# EAGLE board RoomIndicator.Outside.Multiple (EAGLE 6.4)
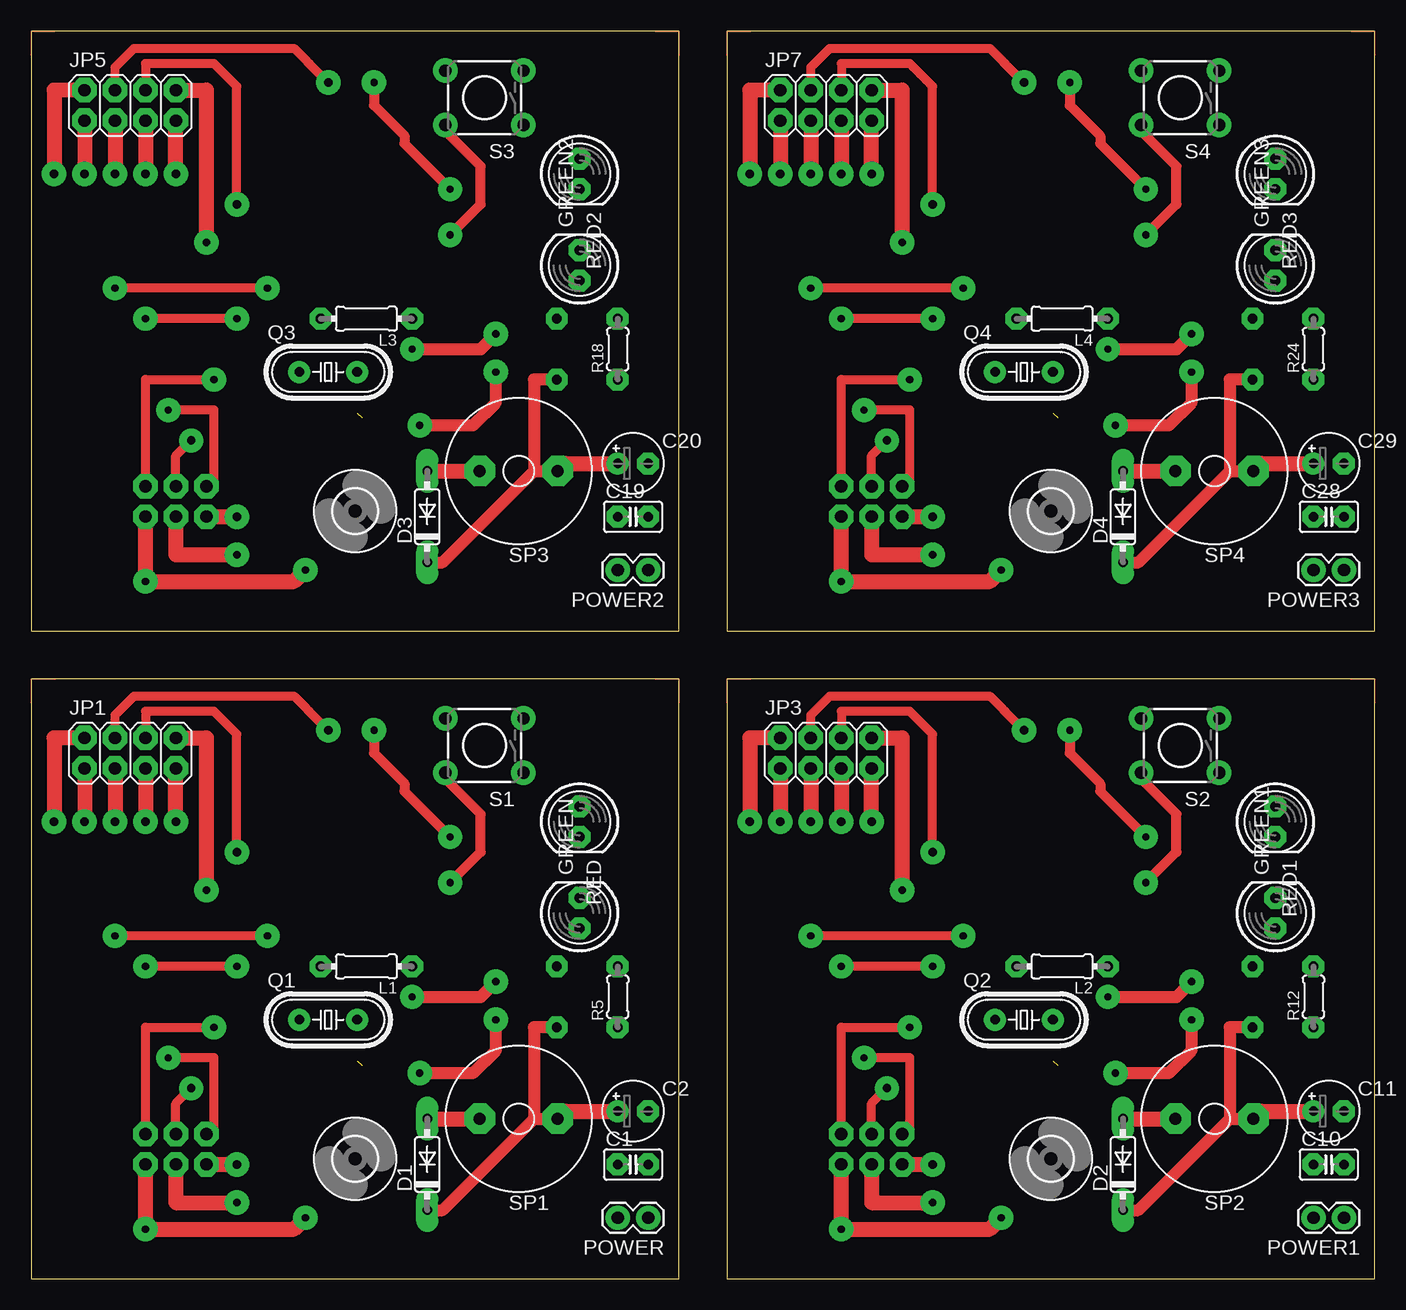
[diagram p0: board, top side]
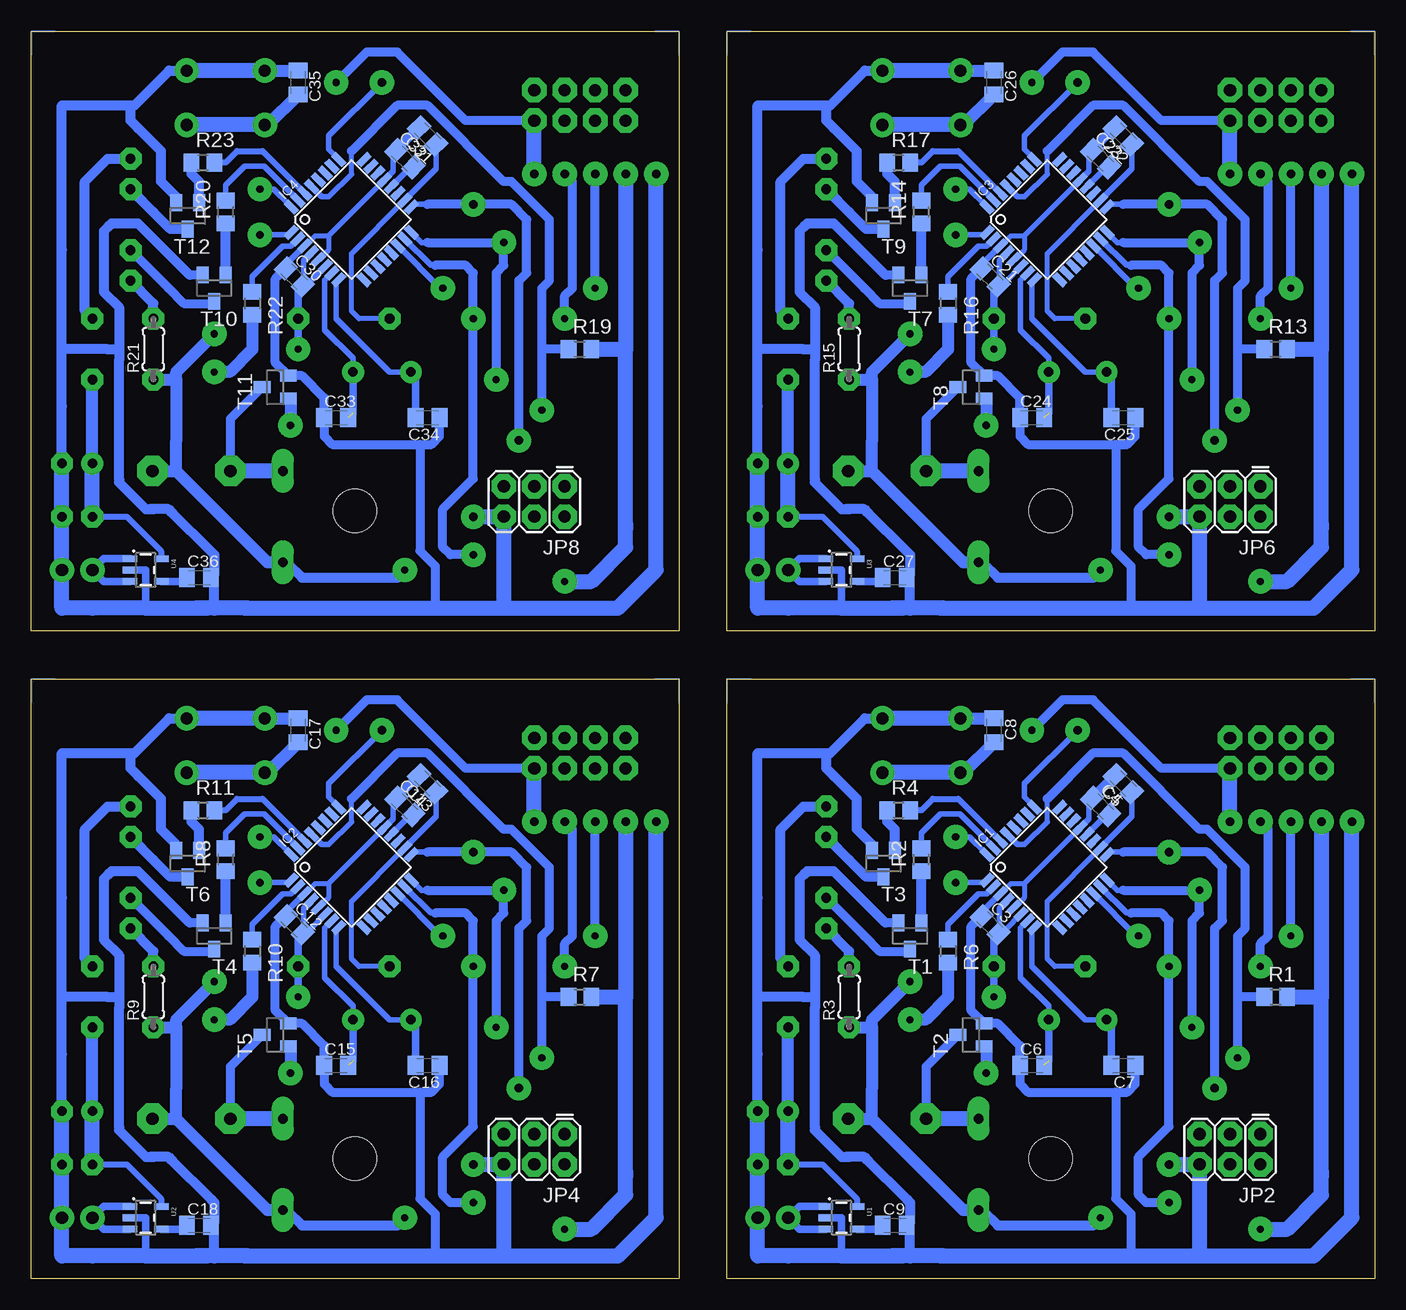
[diagram p1: board, bottom side, seen from below]

Size 112 x 104 mm. Coordinates in mm from the lower left corner, seen from the top.
Outline: 0,0 54,0 54,50 0,50 0,0
Outline: 58,0 112,0 112,50 58,50 58,0
Outline: 0,54 54,54 54,104 0,104 0,54
Outline: 58,54 112,54 112,104 58,104 58,54
Copper layers (1*16): Top 0.035mm / dielectric 1.5mm / Bottom 0.035mm
Design rules "default *": minimum track width 10mil, minimum drill 24mil, track to track 8mil, track to pad 8mil, pad to pad 8mil, via to via 8mil, smd to smd 8mil, copper to edge 40mil, drill to drill 8mil, minimum pad ring 20mil, minimum via ring 10mil, stop-mask expansion 4mil, vias tented up to drill 0mil, thermal gap 10mil

## Footprints (pad centres in the part's own frame; a part is rotated, then mirrored left to right if it is on the bottom)
C025-025X050 = drill 0.813 octagon: 1 -1.27,0; 2 1.27,0
E2,5-5 = drill 0.813 pad 1.6: + -1.27,0 | drill 0.813 pad 1.6 octagon: - 1.27,0
C0805K = smd 1.3 x 1.6: 1 -1,0; 2 1,0
DO35-7 = drill 0.813 long: A 3.81,0; C -3.81,0
LED5MM = drill 0.813 octagon: A -1.27,0; K 1.27,0
TQFP32-08 = smd 1.27 x 0.559: 1 -4.293,2.8; 2 -4.293,2; 3 -4.293,1.2; 4 -4.293,0.4; 5 -4.293,-0.4; 6 -4.293,-1.2; 7 -4.293,-2; 8 -4.293,-2.8; 17 4.293,-2.8; 18 4.293,-2; 19 4.293,-1.2; 20 4.293,-0.4; 21 4.293,0.4; 22 4.293,1.2; 23 4.293,2; 24 4.293,2.8 | smd 0.559 x 1.27: 9 -2.8,-4.293; 10 -2,-4.293; 11 -1.2,-4.293; 12 -0.4,-4.293; 13 0.4,-4.293; 14 1.2,-4.293; 15 2,-4.293; 16 2.8,-4.293; 25 2.8,4.293; 26 2,4.293; 27 1.2,4.293; 28 0.4,4.293; 29 -0.4,4.293; 30 -1.2,4.293; 31 -2,4.293; 32 -2.8,4.293
2X04 = drill 1.016 octagon: 1 -3.81,-1.27; 2 -3.81,1.27; 3 -1.27,-1.27; 4 -1.27,1.27; 5 1.27,-1.27; 6 1.27,1.27; 7 3.81,-1.27; 8 3.81,1.27
2X3 = drill 1.016 pad 1.88 octagon: 1 0,0; 2 0,2.54; 3 2.54,0; 4 2.54,2.54; 5 5.08,0; 6 5.08,2.54
0204/7 = drill 0.813 octagon: 1 -3.81,0; 2 3.81,0
1X02 = drill 1.016 pad 1.88: 1 0,0; 2 2.54,0
HC49/S = drill 0.813: 1 -2.413,0; 2 2.413,0
R0805 = smd 1.3 x 1.5: 1 -0.95,0; 2 0.95,0
0204/5 = drill 0.813 octagon: 1 -2.54,0; 2 2.54,0
TACTILE-PTH = drill 1.016 pad 1.88: 1 -3.251,2.261; 2 3.251,2.261; 3 -3.251,-2.261; 4 3.251,-2.261
AL60P = drill 1.016 pad 2.54 octagon: 1 -3.251,0; 2 3.251,0
SOT23 = smd 1 x 1.4: 1 -0.95,-1.1; 2 0.95,-1.1; 3 0,1.1
SOT23-5 = smd 0.55 x 1.2: 1 -0.95,-1.3; 2 0,-1.3; 3 0.95,-1.3; 4 0.95,1.3; 5 -0.95,1.3
3,6 = hole 3.6: 0,0

## Placement (x,y rotation side)
C1  100n  [C025-025X050]  50.16,9.53 0 top
C2  100uF  [E2,5-5]  50.16,13.97 0 top
C3  100n  [C0805K]  32.07,29.53 315 bottom
C4  100n  [C0805K]  22.86,39.37 315 bottom
C5  100n  [C0805K]  20.95,41.27 135 bottom
C6  27p  [C0805K]  28.57,17.78 0 bottom
C7  27p  [C0805K]  20.95,17.78 180 bottom
C8  100n  [C0805K]  31.75,45.72 270 bottom
C9  180p  [C0805K]  40.01,4.45 0 bottom
C10  100n  [C025-025X050]  108.17,9.53 0 top
C11  100uF  [E2,5-5]  108.17,13.97 0 top
C12  100n  [C0805K]  90.07,29.53 315 bottom
C13  100n  [C0805K]  80.86,39.37 315 bottom
C14  100n  [C0805K]  78.95,41.27 135 bottom
C15  27p  [C0805K]  86.58,17.78 0 bottom
C16  27p  [C0805K]  78.95,17.78 180 bottom
C17  100n  [C0805K]  89.75,45.72 270 bottom
C18  180p  [C0805K]  98,4.45 0 bottom
C19  100n  [C025-025X050]  50.16,63.52 0 top
C20  100uF  [E2,5-5]  50.16,67.97 0 top
C21  100n  [C0805K]  32.07,83.53 315 bottom
C22  100n  [C0805K]  22.86,93.37 315 bottom
C23  100n  [C0805K]  20.95,95.28 135 bottom
C24  27p  [C0805K]  28.57,71.78 0 bottom
C25  27p  [C0805K]  20.95,71.78 180 bottom
C26  100n  [C0805K]  31.75,99.72 270 bottom
C27  180p  [C0805K]  40.01,58.45 0 bottom
C28  100n  [C025-025X050]  108.17,63.52 0 top
C29  100uF  [E2,5-5]  108.17,67.97 0 top
C30  100n  [C0805K]  90.07,83.53 315 bottom
C31  100n  [C0805K]  80.86,93.37 315 bottom
C32  100n  [C0805K]  78.95,95.28 135 bottom
C33  27p  [C0805K]  86.58,71.78 0 bottom
C34  27p  [C0805K]  78.95,71.78 180 bottom
C35  100n  [C0805K]  89.75,99.72 270 bottom
C36  180p  [C0805K]  98,58.45 0 bottom
D1  1N4148  [DO35-7]  33.02,9.53 90 top
D2  1N4148  [DO35-7]  91.02,9.53 90 top
D3  1N4148  [DO35-7]  33.02,63.52 90 top
D4  1N4148  [DO35-7]  91.02,63.52 90 top
GREEN  GREEN  [LED5MM]  45.72,30.48 90 top
GREEN1  GREEN  [LED5MM]  103.72,30.48 90 top
GREEN2  GREEN  [LED5MM]  45.72,84.48 90 top
GREEN3  GREEN  [LED5MM]  103.72,84.48 90 top
IC1  MEGA328P  [TQFP32-08]  27.3,34.29 45 bottom
IC2  MEGA328P  [TQFP32-08]  85.31,34.29 45 bottom
IC3  MEGA328P  [TQFP32-08]  27.3,88.29 45 bottom
IC4  MEGA328P  [TQFP32-08]  85.31,88.29 45 bottom
JP1  NRF24L01  [2X04]  8.26,43.81 0 top
JP2  SPI  [2X3]  9.53,12.06 180 bottom
JP3  NRF24L01  [2X04]  66.25,43.81 0 top
JP4  SPI  [2X3]  67.53,12.06 180 bottom
JP5  NRF24L01  [2X04]  8.26,97.81 0 top
JP6  SPI  [2X3]  9.53,66.06 180 bottom
JP7  NRF24L01  [2X04]  66.25,97.81 0 top
JP8  SPI  [2X3]  67.53,66.06 180 bottom
L1  10uH  [0204/7]  27.94,26.04 180 top
L2  10uH  [0204/7]  85.94,26.04 180 top
L3  10uH  [0204/7]  27.94,80.03 180 top
L4  10uH  [0204/7]  85.94,80.03 180 top
POWER  [1X02]  51.44,5.08 180 top
POWER1  [1X02]  109.44,5.08 180 top
POWER2  [1X02]  51.44,59.08 180 top
POWER3  [1X02]  109.44,59.08 180 top
Q1  8MHz  [HC49/S]  24.77,21.59 0 top
Q2  8MHz  [HC49/S]  82.77,21.59 0 top
Q3  8MHz  [HC49/S]  24.77,75.59 0 top
Q4  8MHz  [HC49/S]  82.77,75.59 0 top
R1  10k  [R0805]  8.26,23.5 0 bottom
R2  10k  [R0805]  37.78,34.92 90 bottom
R3  30  [0204/5]  43.81,23.5 90 bottom
R4  10k  [R0805]  39.69,39.05 0 bottom
R5  30  [0204/5]  48.9,23.5 90 top
R6  10k  [R0805]  35.56,27.3 270 bottom
R7  10k  [R0805]  66.25,23.5 0 bottom
R8  10k  [R0805]  95.78,34.92 90 bottom
R9  30  [0204/5]  101.81,23.5 90 bottom
R10  10k  [R0805]  93.56,27.3 270 bottom
R11  10k  [R0805]  97.69,39.05 0 bottom
R12  30  [0204/5]  106.89,23.5 90 top
R13  10k  [R0805]  8.26,77.5 0 bottom
R14  10k  [R0805]  37.78,88.92 90 bottom
R15  30  [0204/5]  43.81,77.5 90 bottom
R16  10k  [R0805]  35.56,81.31 270 bottom
R17  10k  [R0805]  39.69,93.05 0 bottom
R18  30  [0204/5]  48.9,77.5 90 top
R19  10k  [R0805]  66.25,77.5 0 bottom
R20  10k  [R0805]  95.78,88.92 90 bottom
R21  30  [0204/5]  101.81,77.5 90 bottom
R22  10k  [R0805]  93.56,81.31 270 bottom
R23  10k  [R0805]  97.69,93.05 0 bottom
R24  30  [0204/5]  106.89,77.5 90 top
RED  GREEN  [LED5MM]  45.72,38.1 270 top
RED1  GREEN  [LED5MM]  103.72,38.1 270 top
RED2  GREEN  [LED5MM]  45.72,92.1 270 top
RED3  GREEN  [LED5MM]  103.72,92.1 270 top
S1  [TACTILE-PTH]  37.78,44.45 180 top
S2  [TACTILE-PTH]  95.78,44.45 180 top
S3  [TACTILE-PTH]  37.78,98.45 180 top
S4  [TACTILE-PTH]  95.78,98.45 180 top
SP1  AL60P  [AL60P]  40.64,13.34 180 top
SP2  AL60P  [AL60P]  98.64,13.34 180 top
SP3  AL60P  [AL60P]  40.64,67.33 180 top
SP4  AL60P  [AL60P]  98.64,67.33 180 top
T1  BC847  [SOT23]  38.73,28.57 180 bottom
T2  BC847  [SOT23]  33.66,20.32 90 bottom
T3  BC847  [SOT23]  40.96,34.61 180 bottom
T4  BC847  [SOT23]  96.73,28.57 180 bottom
T5  BC847  [SOT23]  91.66,20.32 90 bottom
T6  BC847  [SOT23]  98.96,34.61 180 bottom
T7  BC847  [SOT23]  38.73,82.58 180 bottom
T8  BC847  [SOT23]  33.66,74.32 90 bottom
T9  BC847  [SOT23]  40.96,88.61 180 bottom
T10  BC847  [SOT23]  96.73,82.58 180 bottom
T11  BC847  [SOT23]  91.66,74.32 90 bottom
T12  BC847  [SOT23]  98.96,88.61 180 bottom
U1  3.3V/150mA  [SOT23-5]  44.45,5.08 270 bottom
U2  3.3V/150mA  [SOT23-5]  102.45,5.08 270 bottom
U3  3.3V/150mA  [SOT23-5]  44.45,59.08 270 bottom
U4  3.3V/150mA  [SOT23-5]  102.45,59.08 270 bottom
U$1  [3,6]  27,10 0 top
U$2  [3,6]  85,10 0 top
U$3  [3,6]  27,64 0 top
U$4  [3,6]  85,64 0 top

## Library data of the parts
C1-C36 L1-L4 R1-R24 = rcl
D1-D4 = diode
GREEN GREEN1-GREEN3 RED RED1-RED3 = led
IC1-IC4 = atmel; MPN: ATMEGA8-16AU; OC_FARNELL: 9171371; OC_NEWARK: 73M8863
JP1 JP3 JP5 JP7 = pinhead
JP2 JP4 JP6 JP8 POWER POWER1-POWER3 = SparkFun-Connectors
Q1-Q4 = crystal; OC_FARNELL: 1667008; OC_NEWARK: unknown
S1-S4 = SparkFun-Retired
SP1-SP4 = buzzer; OC_FARNELL: unknown; OC_NEWARK: unknown
T1-T12 = transistor
U1-U4 = SparkFun-PowerIC; PROD_ID: VREG-00822
U$1-U$4 = holes

## Nets
+3V1: C10.1 C11.+ C12.2 D2.C IC2.4 IC2.6 JP3.1 JP4.2 L2.1 R7.2 R9.1 R12.1 SP2.1 U2.5
+3V2: C19.1 C20.+ C21.2 D3.C IC3.4 IC3.6 JP5.1 JP6.2 L3.1 R13.2 R15.1 R18.1 SP3.1 U3.5
+3V3: C1.1 C2.+ C3.2 D1.C IC1.4 IC1.6 JP1.1 JP2.2 L1.1 R1.2 R3.1 R5.1 SP1.1 U1.5
+3V4: C28.1 C29.+ C30.2 D4.C IC4.4 IC4.6 JP7.1 JP8.2 L4.1 R19.2 R21.1 R24.1 SP4.1 U4.5
AVCC: C5.1 IC1.18 L1.2
AVCC1: C14.1 IC2.18 L2.2
AVCC2: C23.1 IC3.18 L3.2
AVCC3: C32.1 IC4.18 L4.2
BLUE: IC1.31 R2.2
BLUE1: IC2.31 R8.2
BLUE2: IC3.31 R14.2
BLUE3: IC4.31 R20.2
BUZZ: IC1.2 R6.1
BUZZ1: IC2.2 R10.1
BUZZ2: IC3.2 R16.1
BUZZ3: IC4.2 R22.1
CE: IC1.25 JP1.4
CE1: IC2.25 JP3.4
CE2: IC3.25 JP5.4
CE3: IC4.25 JP7.4
CSN: IC1.14 JP1.3
CSN1: IC2.14 JP3.3
CSN2: IC3.14 JP5.3
CSN3: IC4.14 JP7.3
GND: C1.2 C2.- C3.1 C4.1 C5.2 C6.1 C7.1 C8.1 C9.2 IC1.3 IC1.5 IC1.21 JP1.2 JP2.6 POWER.1 S1.3 S1.4 T1.2 T2.2 T3.2 U1.2
GND1: C10.2 C11.- C12.1 C13.1 C14.2 C15.1 C16.1 C17.1 C18.2 IC2.3 IC2.5 IC2.21 JP3.2 JP4.6 POWER1.1 S2.3 S2.4 T4.2 T5.2 T6.2 U2.2
GND2: C19.2 C20.- C21.1 C22.1 C23.2 C24.1 C25.1 C26.1 C27.2 IC3.3 IC3.5 IC3.21 JP5.2 JP6.6 POWER2.1 S3.3 S3.4 T7.2 T8.2 T9.2 U3.2
GND3: C28.2 C29.- C30.1 C31.1 C32.2 C33.1 C34.1 C35.1 C36.2 IC4.3 IC4.5 IC4.21 JP7.2 JP8.6 POWER3.1 S4.3 S4.4 T10.2 T11.2 T12.2 U4.2
INT0: IC1.32 JP1.7
INT1: C8.2 IC1.1 S1.1 S1.2
INT2: C17.2 IC2.1 S2.1 S2.2
INT3: IC2.32 JP3.7
INT4: C26.2 IC3.1 S3.1 S3.2
INT5: IC3.32 JP5.7
INT6: C35.2 IC4.1 S4.1 S4.2
INT7: IC4.32 JP7.7
MISO: IC1.16 JP1.8 JP2.1
MISO1: IC2.16 JP3.8 JP4.1
MISO2: IC3.16 JP5.8 JP6.1
MISO3: IC4.16 JP7.8 JP8.1
MOSI: IC1.15 JP1.5 JP2.4
MOSI1: IC2.15 JP3.5 JP4.4
MOSI2: IC3.15 JP5.5 JP6.4
MOSI3: IC4.15 JP7.5 JP8.4
N$1: POWER.2 U1.1 U1.3
N$2: R4.1 T3.1
N$3: RED.K T3.3
N$4: C4.2 IC1.20
N$5: R6.2 T2.1
N$6: GREEN.A R3.2
N$7: R5.2 RED.A
N$8: C9.1 U1.4
N$10: R2.1 T1.1
N$11: GREEN.K T1.3
N$16: D1.A SP1.2 T2.3
N$20: C13.2 IC2.20
N$21: R8.1 T4.1
N$22: GREEN1.K T4.3
N$23: D2.A SP2.2 T5.3
N$24: R10.2 T5.1
N$25: GREEN1.A R9.2
N$26: POWER1.2 U2.1 U2.3
N$27: R11.1 T6.1
N$28: RED1.K T6.3
N$29: R12.2 RED1.A
N$30: C18.1 U2.4
N$39: C22.2 IC3.20
N$40: R14.1 T7.1
N$41: GREEN2.K T7.3
N$42: D3.A SP3.2 T8.3
N$43: R16.2 T8.1
N$44: GREEN2.A R15.2
N$45: POWER2.2 U3.1 U3.3
N$46: R17.1 T9.1
N$47: RED2.K T9.3
N$48: R18.2 RED2.A
N$49: C27.1 U3.4
N$58: C31.2 IC4.20
N$59: R20.1 T10.1
N$60: GREEN3.K T10.3
N$61: D4.A SP4.2 T11.3
N$62: R22.2 T11.1
N$63: GREEN3.A R21.2
N$64: POWER3.2 U4.1 U4.3
N$65: R23.1 T12.1
N$66: RED3.K T12.3
N$67: R24.2 RED3.A
N$68: C36.1 U4.4
RED: IC1.30 R4.2
RED1: IC2.30 R11.2
RED2: IC3.30 R17.2
RED3: IC4.30 R23.2
RST: IC1.29 JP2.5 R1.1
RST1: IC2.29 JP4.5 R7.1
RST2: IC3.29 JP6.5 R13.1
RST3: IC4.29 JP8.5 R19.1
SCK: IC1.17 JP1.6 JP2.3
SCK1: IC2.17 JP3.6 JP4.3
SCK2: IC3.17 JP5.6 JP6.3
SCK3: IC4.17 JP7.6 JP8.3
TOSC1: C6.2 IC1.7 Q1.2
TOSC2: C7.2 IC1.8 Q1.1
TOSC3: C16.2 IC2.8 Q2.1
TOSC4: C15.2 IC2.7 Q2.2
TOSC5: C25.2 IC3.8 Q3.1
TOSC6: C24.2 IC3.7 Q3.2
TOSC7: C34.2 IC4.8 Q4.1
TOSC8: C33.2 IC4.7 Q4.2

## Tracks (layer width: path | path; a pad name or v marks a point on that pad's centre or on a via)
+3V1  (via drill 0.6 pad 2.03, 0.7 pad 2.03)
  Top 1.016: v89.75,23.5 95.47,23.5 v96.73,24.77 | D2.C 92.29,5.71 99.91,13.34 | 99.91,13.34 101.81,13.34 | R9.1 99.91,20.95 99.91,13.34
  Top 1.27: JP3.1 v62.45,38.1 | JP4.2 v67.53,4.13 79.91,4.13 v80.86,5.08 | SP2.1 102.53,13.97 C11.+
  Bottom 0.457: IC2.6 88.76,29.14 C12.2 89.27,28.91 89.27,30.89 IC2.4
  Bottom 0.508: C10.1 104.04,9.53 101.18,6.67 101.18,6.06 U2.5
  Bottom 0.61: C12.2 89.75,28.43 L2.1 v89.75,23.5
  Bottom 0.813: D2.C 90.7,5.71 89.43,4.45 81.5,4.45 v80.86,5.08
  Bottom 1.016: 99.91,20.95 99.91,21.59 v96.73,24.77 | C11.+ R12.1 | R9.1 99.91,20.95 | 99.91,20.95 99.91,15.88 99.91,13.34 | SP2.1 99.91,13.34 | D2.C 92.29,5.71 99.91,13.34
  Bottom 1.27: C10.1 C11.+ | v62.45,38.1 62.45,23.5 | R7.2 62.45,23.5 | 62.45,23.5 62.45,8.89 62.45,8.57 62.45,6.99 65.3,4.13 v67.53,4.13
+3V2  (via drill 0.6 pad 2.03, 0.7 pad 2.03)
  Top 1.016: v31.75,77.5 37.47,77.5 v38.73,78.77 | D3.C 34.29,59.72 41.91,67.33 | 41.91,67.33 43.81,67.33 | R15.1 41.91,74.95 41.91,67.33
  Top 1.27: JP5.1 v4.45,92.1 | JP6.2 v9.53,58.13 21.91,58.13 v22.86,59.08 | SP3.1 44.53,67.97 C20.+
  Bottom 0.457: IC3.6 30.76,83.14 C21.2 31.27,82.91 31.27,84.89 IC3.4
  Bottom 0.508: C19.1 46.04,63.52 43.18,60.67 43.18,60.06 U3.5
  Bottom 0.61: C21.2 31.75,82.43 L3.1 v31.75,77.5
  Bottom 0.813: D3.C 32.7,59.72 31.43,58.45 23.5,58.45 v22.86,59.08
  Bottom 1.016: 41.91,74.95 41.91,75.59 v38.73,78.77 | C20.+ R18.1 | R15.1 41.91,74.95 | 41.91,74.95 41.91,69.88 41.91,67.33 | SP3.1 41.91,67.33 | D3.C 34.29,59.72 41.91,67.33
  Bottom 1.27: C19.1 C20.+ | v4.45,92.1 4.45,77.5 | R13.2 4.45,77.5 | 4.45,77.5 4.45,62.89 4.45,62.57 4.45,60.98 7.3,58.13 v9.53,58.13
+3V3  (via drill 0.6 pad 2.03, 0.7 pad 2.03)
  Top 1.016: v31.75,23.5 37.47,23.5 v38.73,24.77 | D1.C 34.29,5.71 41.91,13.34 | 41.91,13.34 43.81,13.34 | R3.1 41.91,20.95 41.91,13.34
  Top 1.27: JP1.1 v4.45,38.1 | JP2.2 v9.53,4.13 21.91,4.13 v22.86,5.08 | SP1.1 44.53,13.97 C2.+
  Bottom 0.457: IC1.6 30.76,29.14 C3.2 31.27,28.91 31.27,30.89 IC1.4
  Bottom 0.508: C1.1 46.04,9.53 43.18,6.67 43.18,6.06 U1.5
  Bottom 0.61: C3.2 31.75,28.43 L1.1 v31.75,23.5
  Bottom 0.813: D1.C 32.7,5.71 31.43,4.45 23.5,4.45 v22.86,5.08
  Bottom 1.016: 41.91,20.95 41.91,21.59 v38.73,24.77 | C2.+ R5.1 | R3.1 41.91,20.95 | 41.91,20.95 41.91,15.88 41.91,13.34 | SP1.1 41.91,13.34 | D1.C 34.29,5.71 41.91,13.34
  Bottom 1.27: C1.1 C2.+ | v4.45,38.1 4.45,23.5 | R1.2 4.45,23.5 | 4.45,23.5 4.45,8.89 4.45,8.57 4.45,6.99 7.3,4.13 v9.53,4.13
+3V4  (via drill 0.6 pad 2.03, 0.7 pad 2.03)
  Top 1.016: v89.75,77.5 95.47,77.5 v96.73,78.77 | D4.C 92.29,59.72 99.91,67.33 | 99.91,67.33 101.81,67.33 | R21.1 99.91,74.95 99.91,67.33
  Top 1.27: JP7.1 v62.45,92.1 | JP8.2 v67.53,58.13 79.91,58.13 v80.86,59.08 | SP4.1 102.53,67.97 C29.+
  Bottom 0.457: IC4.6 88.76,83.14 C30.2 89.27,82.91 89.27,84.89 IC4.4
  Bottom 0.508: C28.1 104.04,63.52 101.18,60.67 101.18,60.06 U4.5
  Bottom 0.61: C30.2 89.75,82.43 L4.1 v89.75,77.5
  Bottom 0.813: D4.C 90.7,59.72 89.43,58.45 81.5,58.45 v80.86,59.08
  Bottom 1.016: 99.91,74.95 99.91,75.59 v96.73,78.77 | C29.+ R24.1 | R21.1 99.91,74.95 | 99.91,74.95 99.91,69.88 99.91,67.33 | SP4.1 99.91,67.33 | D4.C 92.29,59.72 99.91,67.33
  Bottom 1.27: C28.1 C29.+ | v62.45,92.1 62.45,77.5 | R19.2 62.45,77.5 | 62.45,77.5 62.45,62.89 62.45,62.57 62.45,60.98 65.3,58.13 v67.53,58.13
AVCC
  Bottom 0.406: L1.2 26.67,26.04 27.3,26.67 27.3,31.46 IC1.18
  Bottom 0.457: IC1.18 20.25,38.52 C5.1
AVCC1
  Bottom 0.406: L2.2 84.67,26.04 85.31,26.67 85.31,31.46 IC2.18
  Bottom 0.457: IC2.18 78.25,38.52 C14.1
AVCC2
  Bottom 0.406: L3.2 26.67,80.03 27.3,80.67 27.3,85.46 IC3.18
  Bottom 0.457: IC3.18 20.25,92.52 C23.1
AVCC3
  Bottom 0.406: L4.2 84.67,80.03 85.31,80.67 85.31,85.46 IC4.18
  Bottom 0.457: IC4.18 78.25,92.52 C32.1
BLUE
  Bottom 0.457: IC1.31 34.58,38.73 36.2,38.73 37.78,37.15 R2.2
BLUE1
  Bottom 0.457: IC2.31 92.58,38.73 94.19,38.73 95.78,37.15 R8.2
BLUE2
  Bottom 0.457: IC3.31 34.58,92.73 36.2,92.73 37.78,91.15 R14.2
BLUE3
  Bottom 0.457: IC4.31 92.58,92.73 94.19,92.73 95.78,91.15 R20.2
BUZZ
  Bottom 0.457: IC1.2 31.78,32.67 32.38,32.07 33.02,32.07 35.56,29.53 R6.1
BUZZ1
  Bottom 0.457: IC2.2 89.78,32.67 90.39,32.07 91.02,32.07 93.56,29.53 R10.1
BUZZ2
  Bottom 0.457: IC3.2 31.78,86.67 32.38,86.07 33.02,86.07 35.56,83.53 R16.1
BUZZ3
  Bottom 0.457: IC4.2 89.78,86.67 90.39,86.07 91.02,86.07 93.56,83.53 R22.1
CE  (via drill 0.7 pad 2.03)
  Top 0.762: JP1.4 6.99,46.99 8.57,48.58 21.91,48.58 22.86,47.62 23.18,47.31 v24.77,45.72
  Bottom 0.457: IC1.25 29.21,40.16 29.21,41.27 v24.77,45.72
CE1  (via drill 0.7 pad 2.03)
  Top 0.762: JP3.4 64.98,46.99 66.57,48.58 79.91,48.58 80.86,47.62 81.18,47.31 v82.77,45.72
  Bottom 0.457: IC2.25 87.21,40.16 87.21,41.27 v82.77,45.72
CE2  (via drill 0.7 pad 2.03)
  Top 0.762: JP5.4 6.99,100.99 8.57,102.58 21.91,102.58 22.86,101.62 23.18,101.31 v24.77,99.72
  Bottom 0.457: IC3.25 29.21,94.16 29.21,95.28 v24.77,99.72
CE3  (via drill 0.7 pad 2.03)
  Top 0.762: JP7.4 64.98,100.99 66.57,102.58 79.91,102.58 80.86,101.62 81.18,101.31 v82.77,99.72
  Bottom 0.457: IC4.25 87.21,94.16 87.21,95.28 v82.77,99.72
CSN  (via drill 0.6 pad 2.03, 0.7 pad 2.03)
  Top 0.762: v19.68,28.57 v6.99,28.57
  Top 1.27: JP1.3 v6.99,38.1
  Bottom 0.457: IC1.14 19.89,28.57 v19.68,28.57
  Bottom 0.762: v6.99,28.57 v6.99,38.1
CSN1  (via drill 0.6 pad 2.03, 0.7 pad 2.03)
  Top 0.762: v77.69,28.57 v64.98,28.57
  Top 1.27: JP3.3 v64.98,38.1
  Bottom 0.457: IC2.14 77.89,28.57 v77.69,28.57
  Bottom 0.762: v64.98,28.57 v64.98,38.1
CSN2  (via drill 0.6 pad 2.03, 0.7 pad 2.03)
  Top 0.762: v19.68,82.58 v6.99,82.58
  Top 1.27: JP5.3 v6.99,92.1
  Bottom 0.457: IC3.14 19.89,82.58 v19.68,82.58
  Bottom 0.762: v6.99,82.58 v6.99,92.1
CSN3  (via drill 0.6 pad 2.03, 0.7 pad 2.03)
  Top 0.762: v77.69,82.58 v64.98,82.58
  Top 1.27: JP7.3 v64.98,92.1
  Bottom 0.457: IC4.14 77.89,82.58 v77.69,82.58
  Bottom 0.762: v64.98,82.58 v64.98,92.1
GND  (via drill 0.7 pad 2.03)
  Top 1.27: JP1.2 1.91,45.09 v1.91,38.1 | JP2.6 v17.14,9.53
  Bottom 0.406: 29.21,32.95 29.21,31.75 29.99,30.97 IC1.5 | IC1.21 29.21,32.95 | IC1.3 30.34,32.95 29.21,32.95
  Bottom 0.457: 32.74,30.55 C3.1 32.77,30.52 IC1.3 | IC1.21 23.81,38.35 23.81,39.83 C4.1
  Bottom 0.61: 33.09,30.41 C3.1 | U1.2 44.45,5.08 44.45,1.91
  Bottom 0.762: C3.1 33.66,29.35 33.66,22.37 T2.2 31.43,21.27 29.57,19.41 C6.1 29.57,16.24 28.89,15.56 21.59,15.56 | C5.2 C4.1 | 21.59,15.56 20.64,15.56 19.95,16.24 C7.1 | 21.59,15.56 21.59,6.67 20.32,5.4 20.32,1.91 | T1.2 40.79,29.68
  Bottom 0.813: C2.- 51.44,18.73 51.44,23.5 | 51.44,23.5 51.44,31.75 51.44,43.81 45.72,43.81 | 51.44,23.5 47.62,23.5 46.67,23.5 | 45.72,43.81 45.4,43.81 45.24,43.97 42.51,46.71 S1.3 | 40.79,29.68 45.09,33.97 47.31,33.97 47.62,33.66 47.94,33.34 47.94,28.26 46.67,26.99 46.67,23.5 | 46.67,23.5 46.67,22.54 46.67,16.19 46.67,12.7 46.67,12.38 44.45,10.16 44.13,10.16 | T3.2 41.91,36.19 43.18,37.47 43.18,40.01 45.09,41.91 45.24,42.07 45.72,42.55 45.72,43.81 | 44.13,10.16 43.81,10.16 | 38.73,5.08 38.73,6.35 39.05,6.67 42.23,9.84 42.55,10.16 44.13,10.16 | 38.73,5.08 38.73,4.71 C9.2 | 38.73,1.91 38.73,5.08
  Bottom 1.016: 34.6,46.71 C8.1
  Bottom 1.27: 35.88,1.91 36.2,1.91 | 36.2,1.91 35.88,1.91 | 35.88,1.91 35.56,1.91 27.94,1.91 20.32,1.91 14.61,1.91 | 14.61,1.91 5.08,1.91 1.91,5.08 v1.91,38.1 | C2.- C1.2 POWER.1 51.44,1.91 48.9,1.91 44.45,1.91 39.37,1.91 | 14.61,1.91 JP2.6 v17.14,9.53 | 34.6,46.71 S1.4 34.6,46.71 | 34.6,46.71 S1.3 | 36.2,1.91 38.73,1.91 39.37,1.91 | 39.37,1.91 40.32,1.91
GND1  (via drill 0.7 pad 2.03)
  Top 1.27: JP3.2 59.91,45.09 v59.91,38.1 | JP4.6 v75.14,9.53
  Bottom 0.406: 87.21,32.95 87.21,31.75 87.99,30.97 IC2.5 | IC2.21 87.21,32.95 | IC2.3 88.34,32.95 87.21,32.95
  Bottom 0.457: 90.74,30.55 C12.1 90.78,30.52 IC2.3 | IC2.21 81.81,38.35 81.81,39.83 C13.1
  Bottom 0.61: 91.09,30.41 C12.1 | U2.2 102.45,5.08 102.45,1.91
  Bottom 0.762: C12.1 91.66,29.35 91.66,22.37 T5.2 89.43,21.27 87.58,19.41 C15.1 87.58,16.24 86.89,15.56 79.59,15.56 | C14.2 C13.1 | 79.59,15.56 78.64,15.56 77.95,16.24 C16.1 | 79.59,15.56 79.59,6.67 78.32,5.4 78.32,1.91 | T4.2 98.79,29.68
  Bottom 0.813: C11.- 109.44,18.73 109.44,23.5 | 109.44,23.5 109.44,31.75 109.44,43.81 103.72,43.81 | 109.44,23.5 105.62,23.5 104.67,23.5 | 103.72,43.81 103.4,43.81 103.24,43.97 100.51,46.71 S2.3 | 98.79,29.68 103.08,33.97 105.31,33.97 105.62,33.66 105.94,33.34 105.94,28.26 104.67,26.99 104.67,23.5 | 104.67,23.5 104.67,22.54 104.67,16.19 104.67,12.7 104.67,12.38 102.45,10.16 102.13,10.16 | T6.2 99.91,36.19 101.18,37.47 101.18,40.01 103.08,41.91 103.24,42.07 103.72,42.55 103.72,43.81 | 102.13,10.16 101.81,10.16 | 96.73,5.08 96.73,6.35 97.05,6.67 100.23,9.84 100.55,10.16 102.13,10.16 | 96.73,5.08 96.73,4.71 C18.2 | 96.73,1.91 96.73,5.08
  Bottom 1.016: 92.6,46.71 C17.1
  Bottom 1.27: 93.88,1.91 94.19,1.91 | 94.19,1.91 93.88,1.91 | 93.88,1.91 93.56,1.91 85.94,1.91 78.32,1.91 72.61,1.91 | 72.61,1.91 63.08,1.91 59.91,5.08 v59.91,38.1 | C11.- C10.2 POWER1.1 109.44,1.91 106.89,1.91 102.45,1.91 97.37,1.91 | 72.61,1.91 JP4.6 v75.14,9.53 | 92.6,46.71 S2.4 92.6,46.71 | 92.6,46.71 S2.3 | 94.19,1.91 96.73,1.91 97.37,1.91 | 97.37,1.91 98.32,1.91
GND2  (via drill 0.7 pad 2.03)
  Top 1.27: JP5.2 1.91,99.08 v1.91,92.1 | JP6.6 v17.14,63.52
  Bottom 0.406: 29.21,86.95 29.21,85.75 29.99,84.97 IC3.5 | IC3.21 29.21,86.95 | IC3.3 30.34,86.95 29.21,86.95
  Bottom 0.457: 32.74,84.55 C21.1 32.77,84.52 IC3.3 | IC3.21 23.81,92.35 23.81,93.83 C22.1
  Bottom 0.61: 33.09,84.41 C21.1 | U3.2 44.45,59.08 44.45,55.91
  Bottom 0.762: C21.1 33.66,83.35 33.66,76.37 T8.2 31.43,75.27 29.57,73.42 C24.1 29.57,70.24 28.89,69.56 21.59,69.56 | C23.2 C22.1 | 21.59,69.56 20.64,69.56 19.95,70.24 C25.1 | 21.59,69.56 21.59,60.67 20.32,59.4 20.32,55.91 | T7.2 40.79,83.67
  Bottom 0.813: C20.- 51.44,72.73 51.44,77.5 | 51.44,77.5 51.44,85.75 51.44,97.81 45.72,97.81 | 51.44,77.5 47.62,77.5 46.67,77.5 | 45.72,97.81 45.4,97.81 45.24,97.97 42.51,100.71 S3.3 | 40.79,83.67 45.09,87.97 47.31,87.97 47.62,87.66 47.94,87.34 47.94,82.26 46.67,80.99 46.67,77.5 | 46.67,77.5 46.67,76.54 46.67,70.19 46.67,66.7 46.67,66.38 44.45,64.16 44.13,64.16 | T9.2 41.91,90.19 43.18,91.47 43.18,94 45.09,95.91 45.24,96.07 45.72,96.55 45.72,97.81 | 44.13,64.16 43.81,64.16 | 38.73,59.08 38.73,60.35 39.05,60.67 42.23,63.84 42.55,64.16 44.13,64.16 | 38.73,59.08 38.73,58.72 C27.2 | 38.73,55.91 38.73,59.08
  Bottom 1.016: 34.6,100.71 C26.1
  Bottom 1.27: 35.88,55.91 36.2,55.91 | 36.2,55.91 35.88,55.91 | 35.88,55.91 35.56,55.91 27.94,55.91 20.32,55.91 14.61,55.91 | 14.61,55.91 5.08,55.91 1.91,59.08 v1.91,92.1 | C20.- C19.2 POWER2.1 51.44,55.91 48.9,55.91 44.45,55.91 39.37,55.91 | 14.61,55.91 JP6.6 v17.14,63.52 | 34.6,100.71 S3.4 34.6,100.71 | 34.6,100.71 S3.3 | 36.2,55.91 38.73,55.91 39.37,55.91 | 39.37,55.91 40.32,55.91
GND3  (via drill 0.7 pad 2.03)
  Top 1.27: JP7.2 59.91,99.08 v59.91,92.1 | JP8.6 v75.14,63.52
  Bottom 0.406: 87.21,86.95 87.21,85.75 87.99,84.97 IC4.5 | IC4.21 87.21,86.95 | IC4.3 88.34,86.95 87.21,86.95
  Bottom 0.457: 90.74,84.55 C30.1 90.78,84.52 IC4.3 | IC4.21 81.81,92.35 81.81,93.83 C31.1
  Bottom 0.61: 91.09,84.41 C30.1 | U4.2 102.45,59.08 102.45,55.91
  Bottom 0.762: C30.1 91.66,83.35 91.66,76.37 T11.2 89.43,75.27 87.58,73.42 C33.1 87.58,70.24 86.89,69.56 79.59,69.56 | C32.2 C31.1 | 79.59,69.56 78.64,69.56 77.95,70.24 C34.1 | 79.59,69.56 79.59,60.67 78.32,59.4 78.32,55.91 | T10.2 98.79,83.67
  Bottom 0.813: C29.- 109.44,72.73 109.44,77.5 | 109.44,77.5 109.44,85.75 109.44,97.81 103.72,97.81 | 109.44,77.5 105.62,77.5 104.67,77.5 | 103.72,97.81 103.4,97.81 103.24,97.97 100.51,100.71 S4.3 | 98.79,83.67 103.08,87.97 105.31,87.97 105.62,87.66 105.94,87.34 105.94,82.26 104.67,80.99 104.67,77.5 | 104.67,77.5 104.67,76.54 104.67,70.19 104.67,66.7 104.67,66.38 102.45,64.16 102.13,64.16 | T12.2 99.91,90.19 101.18,91.47 101.18,94 103.08,95.91 103.24,96.07 103.72,96.55 103.72,97.81 | 102.13,64.16 101.81,64.16 | 96.73,59.08 96.73,60.35 97.05,60.67 100.23,63.84 100.55,64.16 102.13,64.16 | 96.73,59.08 96.73,58.72 C36.2 | 96.73,55.91 96.73,59.08
  Bottom 1.016: 92.6,100.71 C35.1
  Bottom 1.27: 93.88,55.91 94.19,55.91 | 94.19,55.91 93.88,55.91 | 93.88,55.91 93.56,55.91 85.94,55.91 78.32,55.91 72.61,55.91 | 72.61,55.91 63.08,55.91 59.91,59.08 v59.91,92.1 | C29.- C28.2 POWER3.1 109.44,55.91 106.89,55.91 102.45,55.91 97.37,55.91 | 72.61,55.91 JP8.6 v75.14,63.52 | 92.6,100.71 S4.4 92.6,100.71 | 92.6,100.71 S4.3 | 94.19,55.91 96.73,55.91 97.37,55.91 | 97.37,55.91 98.32,55.91
INT0  (via drill 0.6 pad 2.03, 0.7 pad 2.03)
  Top 0.813: v28.57,45.72 28.57,43.81 31.11,41.27 31.11,40.64 v34.92,36.83
  Top 1.27: v12.06,38.1 JP1.7
  Bottom 0.457: IC1.32 33.17,36.2 33.8,36.83 v34.92,36.83
  Bottom 0.762: JP1.7 17.78,42.55 23.5,48.26 26.04,48.26 v28.57,45.72
  Bottom 1.27: v12.06,38.1 JP1.7
INT1  (via drill 0.6 pad 2.03)
  Top 0.813: v34.92,33.02 37.47,35.56 37.47,38.73 36.2,40.01 34.53,41.67 S1.2
  Bottom 0.457: IC1.1 32.53,33.02 v34.92,33.02
  Bottom 1.016: 35.23,42.19 34.28,42.19 C8.2
  Bottom 1.27: 35.23,42.19 S1.2 35.23,42.19 | 35.23,42.19 S1.1
INT2  (via drill 0.6 pad 2.03)
  Top 0.813: v92.92,33.02 95.47,35.56 95.47,38.73 94.19,40.01 92.53,41.67 S2.2
  Bottom 0.457: IC2.1 90.53,33.02 v92.92,33.02
  Bottom 1.016: 93.23,42.19 92.28,42.19 C17.2
  Bottom 1.27: 93.23,42.19 S2.2 93.23,42.19 | 93.23,42.19 S2.1
INT3  (via drill 0.6 pad 2.03, 0.7 pad 2.03)
  Top 0.813: v86.58,45.72 86.58,43.81 89.11,41.27 89.11,40.64 v92.92,36.83
  Top 1.27: v70.06,38.1 JP3.7
  Bottom 0.457: IC2.32 91.17,36.2 91.81,36.83 v92.92,36.83
  Bottom 0.762: JP3.7 75.78,42.55 81.5,48.26 84.03,48.26 v86.58,45.72
  Bottom 1.27: v70.06,38.1 JP3.7
INT4  (via drill 0.6 pad 2.03)
  Top 0.813: v34.92,87.02 37.47,89.56 37.47,92.73 36.2,94 34.53,95.67 S3.2
  Bottom 0.457: IC3.1 32.53,87.02 v34.92,87.02
  Bottom 1.016: 35.23,96.19 34.28,96.19 C26.2
  Bottom 1.27: 35.23,96.19 S3.2 35.23,96.19 | 35.23,96.19 S3.1
INT5  (via drill 0.6 pad 2.03, 0.7 pad 2.03)
  Top 0.813: v28.57,99.72 28.57,97.81 31.11,95.28 31.11,94.64 v34.92,90.83
  Top 1.27: v12.06,92.1 JP5.7
  Bottom 0.457: IC3.32 33.17,90.19 33.8,90.83 v34.92,90.83
  Bottom 0.762: JP5.7 17.78,96.55 23.5,102.26 26.04,102.26 v28.57,99.72
  Bottom 1.27: v12.06,92.1 JP5.7
INT6  (via drill 0.6 pad 2.03)
  Top 0.813: v92.92,87.02 95.47,89.56 95.47,92.73 94.19,94 92.53,95.67 S4.2
  Bottom 0.457: IC4.1 90.53,87.02 v92.92,87.02
  Bottom 1.016: 93.23,96.19 92.28,96.19 C35.2
  Bottom 1.27: 93.23,96.19 S4.2 93.23,96.19 | 93.23,96.19 S4.1
INT7  (via drill 0.6 pad 2.03, 0.7 pad 2.03)
  Top 0.813: v86.58,99.72 86.58,97.81 89.11,95.28 89.11,94.64 v92.92,90.83
  Top 1.27: v70.06,92.1 JP7.7
  Bottom 0.457: IC4.32 91.17,90.19 91.81,90.83 v92.92,90.83
  Bottom 0.762: JP7.7 75.78,96.55 81.5,102.26 84.03,102.26 v86.58,99.72
  Bottom 1.27: v70.06,92.1 JP7.7
MISO  (via drill 0.6 pad 2.03)
  Top 0.762: JP2.1 9.53,20.95 v15.24,20.95
  Top 1.27: JP1.8 14.61,45.09 v14.61,32.38
  Bottom 0.457: IC1.16 21.44,32.38 20.95,32.38
  Bottom 0.762: 20.95,32.38 v14.61,32.38 14.61,30.48 15.24,29.84 v15.24,20.95
MISO1  (via drill 0.6 pad 2.03)
  Top 0.762: JP4.1 67.53,20.95 v73.24,20.95
  Top 1.27: JP3.8 72.61,45.09 v72.61,32.38
  Bottom 0.457: IC2.16 79.44,32.38 78.95,32.38
  Bottom 0.762: 78.95,32.38 v72.61,32.38 72.61,30.48 73.24,29.84 v73.24,20.95
MISO2  (via drill 0.6 pad 2.03)
  Top 0.762: JP6.1 9.53,74.95 v15.24,74.95
  Top 1.27: JP5.8 14.61,99.08 v14.61,86.39
  Bottom 0.457: IC3.16 21.44,86.39 20.95,86.39
  Bottom 0.762: 20.95,86.39 v14.61,86.39 14.61,84.48 15.24,83.84 v15.24,74.95
MISO3  (via drill 0.6 pad 2.03)
  Top 0.762: JP8.1 67.53,74.95 v73.24,74.95
  Top 1.27: JP7.8 72.61,99.08 v72.61,86.39
  Bottom 0.457: IC4.16 79.44,86.39 78.95,86.39
  Bottom 0.762: 78.95,86.39 v72.61,86.39 72.61,84.48 73.24,83.84 v73.24,74.95
MOSI  (via drill 0.6 pad 2.03, 0.7 pad 2.03)
  Top 0.762: v17.14,26.04 v9.53,26.04
  Top 1.27: JP1.5 v9.53,38.1 | JP2.4 12.06,6.35 v17.14,6.35
  Bottom 0.457: IC1.15 20.67,30.48 20.32,30.48
  Bottom 0.762: 20.32,30.48 17.78,30.48 17.14,29.84 v17.14,26.04 17.14,12.7 19.68,10.16 19.68,6.99 19.05,6.35 v17.14,6.35 | v9.53,26.04 9.53,27.94 8.89,28.57 8.89,37.47 v9.53,38.1
MOSI1  (via drill 0.6 pad 2.03, 0.7 pad 2.03)
  Top 0.762: v75.14,26.04 v67.53,26.04
  Top 1.27: JP3.5 v67.53,38.1 | JP4.4 70.06,6.35 v75.14,6.35
  Bottom 0.457: IC2.15 78.67,30.48 78.32,30.48
  Bottom 0.762: 78.32,30.48 75.78,30.48 75.14,29.84 v75.14,26.04 75.14,12.7 77.69,10.16 77.69,6.99 77.05,6.35 v75.14,6.35 | v67.53,26.04 67.53,27.94 66.89,28.57 66.89,37.47 v67.53,38.1
MOSI2  (via drill 0.6 pad 2.03, 0.7 pad 2.03)
  Top 0.762: v17.14,80.03 v9.53,80.03
  Top 1.27: JP5.5 v9.53,92.1 | JP6.4 12.06,60.35 v17.14,60.35
  Bottom 0.457: IC3.15 20.67,84.48 20.32,84.48
  Bottom 0.762: 20.32,84.48 17.78,84.48 17.14,83.84 v17.14,80.03 17.14,66.7 19.68,64.16 19.68,60.98 19.05,60.35 v17.14,60.35 | v9.53,80.03 9.53,81.94 8.89,82.58 8.89,91.47 v9.53,92.1
MOSI3  (via drill 0.6 pad 2.03, 0.7 pad 2.03)
  Top 0.762: v75.14,80.03 v67.53,80.03
  Top 1.27: JP7.5 v67.53,92.1 | JP8.4 70.06,60.35 v75.14,60.35
  Bottom 0.457: IC4.15 78.67,84.48 78.32,84.48
  Bottom 0.762: 78.32,84.48 75.78,84.48 75.14,83.84 v75.14,80.03 75.14,66.7 77.69,64.16 77.69,60.98 77.05,60.35 v75.14,60.35 | v67.53,80.03 67.53,81.94 66.89,82.58 66.89,91.47 v67.53,92.1
N$1
  Bottom 0.61: U1.1 47.95,6.03 POWER.2 47.95,4.13 U1.3
N$2
  Bottom 0.813: T3.1 40.01,37.47 40.64,38.1 R4.1
N$3
  Bottom 0.813: T3.3 42.4,33.51 43.81,34.92 44.77,35.88 RED.K
N$4
  Bottom 0.457: IC1.20 22.37,38.66 C4.2
N$5  (via drill 0.6 pad 2.03)
  Top 1.016: v32.38,17.14 36.83,17.14 38.73,19.05 v38.73,21.59
  Bottom 1.016: T2.1 32.38,19.37 v32.38,17.14 | R6.2 35.56,23.5 37.47,21.59 v38.73,21.59
N$6
  Bottom 0.813: R3.2 43.81,27.3 GREEN.A
N$7
  Bottom 0.813: R5.2 49.53,26.67 49.53,37.47 47.62,39.37 RED.A
N$8
  Bottom 0.61: U1.4 41.32,4.13 C9.1
N$9
  Bottom 0.1: 0,48 0,50 2,50
N$10
  Bottom 0.813: T1.1 R2.1
N$11
  Bottom 0.762: T1.3 38.91,27.3 41.27,27.3 42.55,28.57 GREEN.K
N$12
  Bottom 0.1: 52,50 54,50 54,48
N$13
  Bottom 0.1: 52,0 54,0 54,2
N$14
  Bottom 0.1: 0,2 0,0 2,0
N$15
  Top 0.1: 0,48 0,50 2,50
N$16
  Top 1.27: D1.A SP1.2
  Bottom 0.762: SP1.2 37.39,17.69 T2.3
  Bottom 1.27: D1.A 37.47,13.34
N$17
  Top 0.1: 52,50 54,50 54,48
N$18
  Top 0.1: 52,0 54,0 54,2
N$19
  Top 0.1: 0,2 0,0 2,0
N$20
  Bottom 0.457: IC2.20 80.37,38.66 C13.2
N$21
  Bottom 0.813: T4.1 R8.1
N$22
  Bottom 0.762: T4.3 96.91,27.3 99.28,27.3 100.55,28.57 GREEN1.K
N$23
  Top 1.27: D2.A SP2.2
  Bottom 0.762: SP2.2 95.39,17.69 T5.3
  Bottom 1.27: D2.A 95.47,13.34
N$24  (via drill 0.6 pad 2.03)
  Top 1.016: v90.39,17.14 94.83,17.14 96.73,19.05 v96.73,21.59
  Bottom 1.016: T5.1 90.39,19.37 v90.39,17.14 | R10.2 93.56,23.5 95.47,21.59 v96.73,21.59
N$25
  Bottom 0.813: R9.2 101.81,27.3 GREEN1.A
N$26
  Bottom 0.61: U2.1 105.94,6.03 POWER1.2 105.94,4.13 U2.3
N$27
  Bottom 0.813: T6.1 98,37.47 98.64,38.1 R11.1
N$28
  Bottom 0.813: T6.3 100.4,33.51 101.81,34.92 102.77,35.88 RED1.K
N$29
  Bottom 0.813: R12.2 107.53,26.67 107.53,37.47 105.62,39.37 RED1.A
N$30
  Bottom 0.61: U2.4 99.32,4.13 C18.1
N$31
  Bottom 0.1: 58,48 58,50 60,50
N$32
  Bottom 0.1: 110,50 112,50 112,48
N$33
  Bottom 0.1: 110,0 112,0 112,2
N$34
  Bottom 0.1: 58,2 58,0 60,0
N$35
  Top 0.1: 58,48 58,50 60,50
N$36
  Top 0.1: 110,50 112,50 112,48
N$37
  Top 0.1: 110,0 112,0 112,2
N$38
  Top 0.1: 58,2 58,0 60,0
N$39
  Bottom 0.457: IC3.20 22.37,92.66 C22.2
N$40
  Bottom 0.813: T7.1 R14.1
N$41
  Bottom 0.762: T7.3 38.91,81.31 41.27,81.31 42.55,82.58 GREEN2.K
N$42
  Top 1.27: D3.A SP3.2
  Bottom 0.762: SP3.2 37.39,71.69 T8.3
  Bottom 1.27: D3.A 37.47,67.33
N$43  (via drill 0.6 pad 2.03)
  Top 1.016: v32.38,71.14 36.83,71.14 38.73,73.05 v38.73,75.59
  Bottom 1.016: T8.1 32.38,73.37 v32.38,71.14 | R16.2 35.56,77.5 37.47,75.59 v38.73,75.59
N$44
  Bottom 0.813: R15.2 43.81,81.31 GREEN2.A
N$45
  Bottom 0.61: U3.1 47.95,60.03 POWER2.2 47.95,58.13 U3.3
N$46
  Bottom 0.813: T9.1 40.01,91.47 40.64,92.1 R17.1
N$47
  Bottom 0.813: T9.3 42.4,87.51 43.81,88.92 44.77,89.88 RED2.K
N$48
  Bottom 0.813: R18.2 49.53,80.67 49.53,91.47 47.62,93.37 RED2.A
N$49
  Bottom 0.61: U3.4 41.32,58.13 C27.1
N$50
  Bottom 0.1: 0,102 0,104 2,104
N$51
  Bottom 0.1: 52,104 54,104 54,102
N$52
  Bottom 0.1: 52,54 54,54 54,56
N$53
  Bottom 0.1: 0,56 0,54 2,54
N$54
  Top 0.1: 0,102 0,104 2,104
N$55
  Top 0.1: 52,104 54,104 54,102
N$56
  Top 0.1: 52,54 54,54 54,56
N$57
  Top 0.1: 0,56 0,54 2,54
N$58
  Bottom 0.457: IC4.20 80.37,92.66 C31.2
N$59
  Bottom 0.813: T10.1 R20.1
N$60
  Bottom 0.762: T10.3 96.91,81.31 99.28,81.31 100.55,82.58 GREEN3.K
N$61
  Top 1.27: D4.A SP4.2
  Bottom 0.762: SP4.2 95.39,71.69 T11.3
  Bottom 1.27: D4.A 95.47,67.33
N$62  (via drill 0.6 pad 2.03)
  Top 1.016: v90.39,71.14 94.83,71.14 96.73,73.05 v96.73,75.59
  Bottom 1.016: T11.1 90.39,73.37 v90.39,71.14 | R22.2 93.56,77.5 95.47,75.59 v96.73,75.59
N$63
  Bottom 0.813: R21.2 101.81,81.31 GREEN3.A
N$64
  Bottom 0.61: U4.1 105.94,60.03 POWER3.2 105.94,58.13 U4.3
N$65
  Bottom 0.813: T12.1 98,91.47 98.64,92.1 R23.1
N$66
  Bottom 0.813: T12.3 100.4,87.51 101.81,88.92 102.77,89.88 RED3.K
N$67
  Bottom 0.813: R24.2 107.53,80.67 107.53,91.47 105.62,93.37 RED3.A
N$68
  Bottom 0.61: U4.4 99.32,58.13 C36.1
N$69
  Bottom 0.1: 58,102 58,104 60,104
N$70
  Bottom 0.1: 110,104 112,104 112,102
N$71
  Bottom 0.1: 110,54 112,54 112,56
N$72
  Bottom 0.1: 58,56 58,54 60,54
N$73
  Top 0.1: 58,102 58,104 60,104
N$74
  Top 0.1: 110,104 112,104 112,102
N$75
  Top 0.1: 110,54 112,54 112,56
N$76
  Top 0.1: 58,56 58,54 60,54
RED
  Bottom 0.508: IC1.30 34.72,40.01 36.83,40.01 37.78,39.05 R4.2
RED1
  Bottom 0.508: IC2.30 92.72,40.01 94.83,40.01 95.78,39.05 R11.2
RED2
  Bottom 0.508: IC3.30 34.72,94 36.83,94 37.78,93.05 R17.2
RED3
  Bottom 0.508: IC4.30 92.72,94 94.83,94 95.78,93.05 R23.2
RST  (via drill 0.6 pad 2.03)
  Top 0.762: JP2.5 15.24,12.7 15.24,18.41 v11.43,18.41
  Bottom 0.406: 27.3,38.1 27.3,40.01
  Bottom 0.457: IC1.29 29.78,36.2 29.21,36.2 27.3,38.1
  Bottom 0.762: 27.3,40.01 23.5,43.81 20.95,43.81 14.61,37.47 13.97,37.47 10.79,34.29 10.79,29.21 11.43,28.57 11.43,23.5 | R1.1 11.43,23.5 | v11.43,18.41 11.43,23.5
RST1  (via drill 0.6 pad 2.03)
  Top 0.762: JP4.5 73.24,12.7 73.24,18.41 v69.43,18.41
  Bottom 0.406: 85.31,38.1 85.31,40.01
  Bottom 0.457: IC2.29 87.78,36.2 87.21,36.2 85.31,38.1
  Bottom 0.762: 85.31,40.01 81.5,43.81 78.95,43.81 72.61,37.47 71.97,37.47 68.8,34.29 68.8,29.21 69.43,28.57 69.43,23.5 | R7.1 69.43,23.5 | v69.43,18.41 69.43,23.5
RST2  (via drill 0.6 pad 2.03)
  Top 0.762: JP6.5 15.24,66.7 15.24,72.42 v11.43,72.42
  Bottom 0.406: 27.3,92.1 27.3,94
  Bottom 0.457: IC3.29 29.78,90.19 29.21,90.19 27.3,92.1
  Bottom 0.762: 27.3,94 23.5,97.81 20.95,97.81 14.61,91.47 13.97,91.47 10.79,88.29 10.79,83.21 11.43,82.58 11.43,77.5 | R13.1 11.43,77.5 | v11.43,72.42 11.43,77.5
RST3  (via drill 0.6 pad 2.03)
  Top 0.762: JP8.5 73.24,66.7 73.24,72.42 v69.43,72.42
  Bottom 0.406: 85.31,92.1 85.31,94
  Bottom 0.457: IC4.29 87.78,90.19 87.21,90.19 85.31,92.1
  Bottom 0.762: 85.31,94 81.5,97.81 78.95,97.81 72.61,91.47 71.97,91.47 68.8,88.29 68.8,83.21 69.43,82.58 69.43,77.5 | R19.1 69.43,77.5 | v69.43,72.42 69.43,77.5
SCK  (via drill 0.7 pad 2.03)
  Top 0.762: v17.14,35.56 17.14,45.4 15.24,47.31 9.53,47.31 JP1.6 | JP2.3 12.06,14.61 v13.34,15.88
  Bottom 0.457: 20.95,35.56 22.07,35.56 IC1.17
  Bottom 0.762: 20.95,35.56 v17.14,35.56 13.97,35.56 12.7,34.29 12.7,29.84 13.34,29.21 v13.34,15.88
SCK1  (via drill 0.7 pad 2.03)
  Top 0.762: v75.14,35.56 75.14,45.4 73.24,47.31 67.53,47.31 JP3.6 | JP4.3 70.06,14.61 v71.33,15.88
  Bottom 0.457: 78.95,35.56 80.08,35.56 IC2.17
  Bottom 0.762: 78.95,35.56 v75.14,35.56 71.97,35.56 70.7,34.29 70.7,29.84 71.33,29.21 v71.33,15.88
SCK2  (via drill 0.7 pad 2.03)
  Top 0.762: v17.14,89.56 17.14,99.4 15.24,101.31 9.53,101.31 JP5.6 | JP6.3 12.06,68.61 v13.34,69.88
  Bottom 0.457: 20.95,89.56 22.07,89.56 IC3.17
  Bottom 0.762: 20.95,89.56 v17.14,89.56 13.97,89.56 12.7,88.29 12.7,83.84 13.34,83.21 v13.34,69.88
SCK3  (via drill 0.7 pad 2.03)
  Top 0.762: v75.14,89.56 75.14,99.4 73.24,101.31 67.53,101.31 JP7.6 | JP8.3 70.06,68.61 v71.33,69.88
  Bottom 0.457: 78.95,89.56 80.08,89.56 IC4.17
  Bottom 0.762: 78.95,89.56 v75.14,89.56 71.97,89.56 70.7,88.29 70.7,83.84 71.33,83.21 v71.33,69.88
TOSC1  (1 unrouted)
  Bottom 0.457: Q1.2 27.18,22.73 29.53,25.08 29.53,29.24 IC1.7
  Bottom 0.61: 27.18,18.18 Q1.2
TOSC2
  Bottom 0.457: IC1.8 28.57,29.06 28.57,26.04 24.13,21.59 Q1.1
  Bottom 0.61: Q1.1 21.95,21.19 C7.2
TOSC3
  Bottom 0.457: IC2.8 86.58,29.06 86.58,26.04 82.13,21.59 Q2.1
  Bottom 0.61: Q2.1 79.95,21.19 C16.2
TOSC4  (1 unrouted)
  Bottom 0.457: Q2.2 85.18,22.73 87.53,25.08 87.53,29.24 IC2.7
  Bottom 0.61: 85.18,18.18 Q2.2
TOSC5
  Bottom 0.457: IC3.8 28.57,83.06 28.57,80.03 24.13,75.59 Q3.1
  Bottom 0.61: Q3.1 21.95,75.19 C25.2
TOSC6  (1 unrouted)
  Bottom 0.457: Q3.2 27.18,76.73 29.53,79.08 29.53,83.24 IC3.7
  Bottom 0.61: 27.18,72.18 Q3.2
TOSC7
  Bottom 0.457: IC4.8 86.58,83.06 86.58,80.03 82.13,75.59 Q4.1
  Bottom 0.61: Q4.1 79.95,75.19 C34.2
TOSC8  (1 unrouted)
  Bottom 0.457: Q4.2 85.18,76.73 87.53,79.08 87.53,83.24 IC4.7
  Bottom 0.61: 85.18,72.18 Q4.2